# Altium PCB RYA_ESC.PcbDoc (part 2 of 4)
Units mm, origin at the board's own origin, x right, y up, seen from the top; angles counter-clockwise.
Board outline 81.86 x 50.16 mm, 4 copper layers (Top Layer, Signal1, Signal2, Bottom Layer), stack 1.586 mm thick; 309 components, 155 nets, 862 pads, 372 vias.
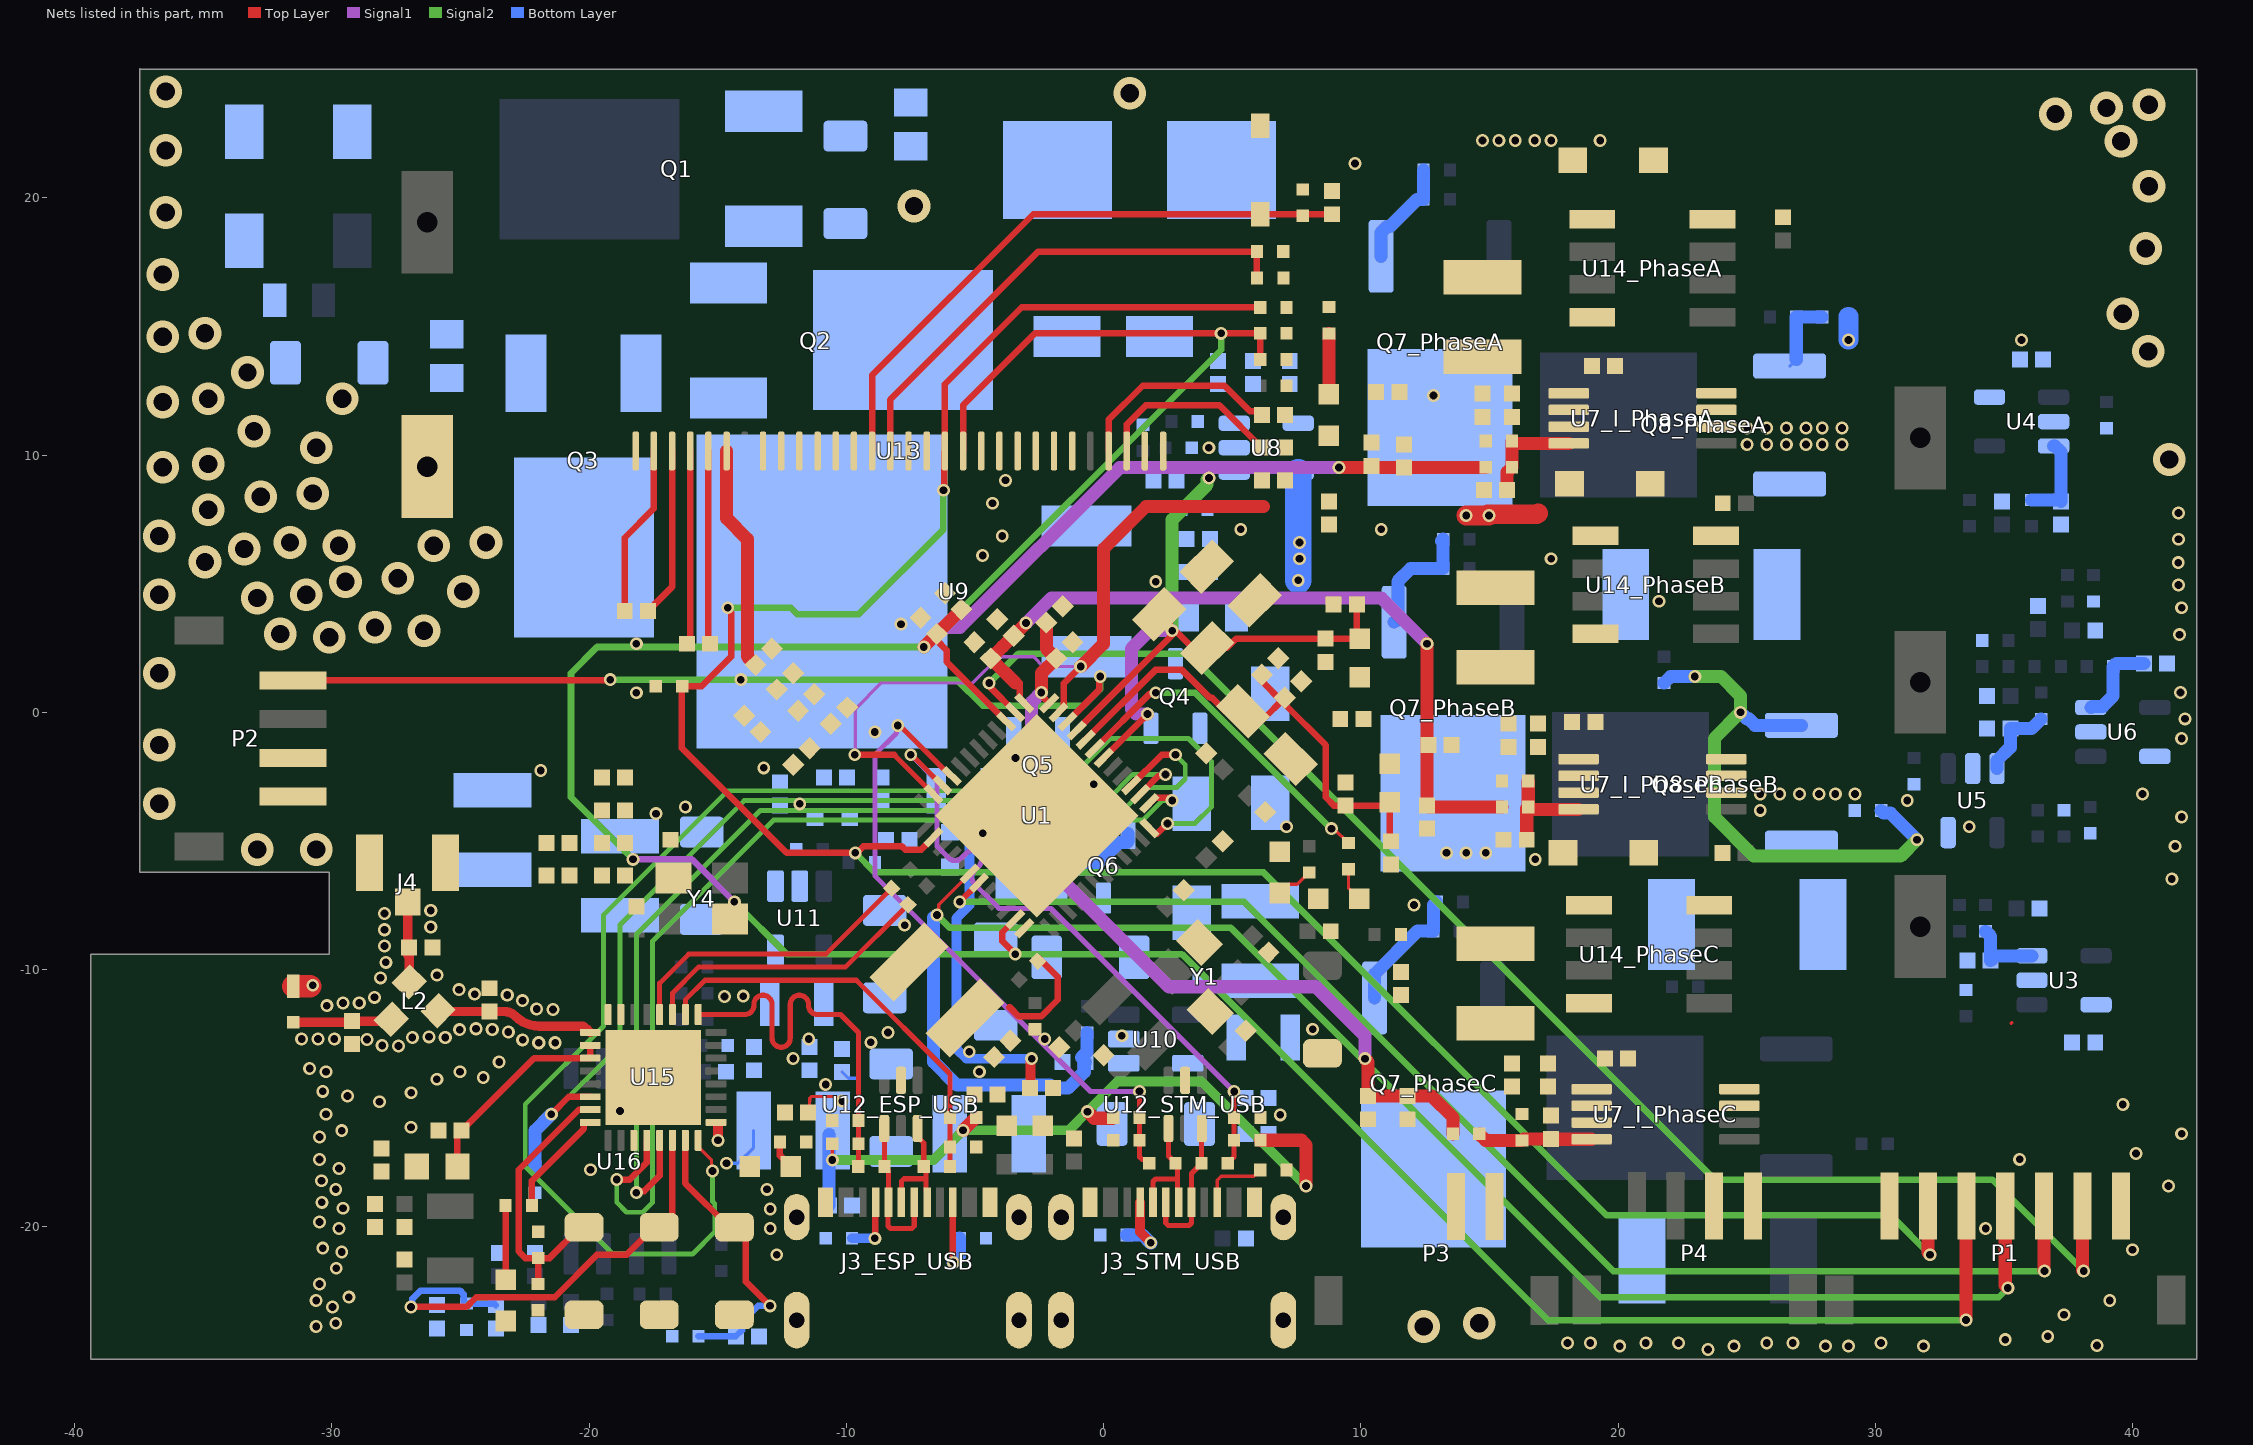
[diagram p4: the nets of this part, all layers, seen from the top]

## Part data
Ant1: library part CMP-240-000001-3, "Antenna Invert F 2.4Ghz", Component Type=Standard, Design Item ID=IFA-2.4Ghz, Pin Count=2, Source=IFA2.4GHZ.SchLib
C1 C80: library part CMP-001-00375-1, "470 µF Molded Tantalum Polymer Capacitor 25 V 1411 (3528 Metric), 1210 150mOhm @ 100kHz", Case/Package="1210 AVX", Check_prices=https://www.snapeda.com/parts/TCJB106M025R0150/AVX/view-part/?ref=eda, Component Type=Standard, Design Item ID=TCJB106M025R0150, MF=AVX, MP=TCJB106M025R0150, Pins=2, SnapEDA_Link=https://www.snapeda.com/parts/TCJB106M025R0150/AVX/view-part/?ref=snap, Source=TCJB106M025R0150.SchLib
C2 C3 C4 C5 C6 C10 C11 C12 C14 C15 C16 C56 C57 C62 C63 C70_ESP_USB C70_STM_USB C91 C93 C95 C104 C105: library part CMP-001-00354-3, "Capacitor 100nF 0402", Case Code (Metric)=1005, Case/Package=0402, Dielectric=X5R, Max Operating Temperature=85°C, Min Operating Temperature=-55°C, Package Quantity=1, Tolerance=20%, Voltage Rating=4V, Component Type=Standard, Construction=Flat, Design Item ID=CMP-1034-02139-2, Halogen Free="Halogen Free", Height=0.5mm, Length=0.039inch, Mount="Surface Mount", Packaging="Tape and Reel", Pins=2, RoHS Compliant=Yes, Series=M, Source=0402-10uF.SchLib, Termination=SMD/SMT, Thickness=0.028inch, Voltage Rating (DC)=4V, Width=0.02inch
C7 C73: library part CMP-001-00364-1, "Capacitor 4.7uF 0402", Case Code (Metric)=1005, Case/Package=0402, Dielectric=X5R, Max Operating Temperature=85°C, Min Operating Temperature=-55°C, Package Quantity=1, Tolerance=20%, Voltage Rating=4V, Component Type=Standard, Construction=Flat, Design Item ID=CMP-1034-02139-2, Halogen Free="Halogen Free", Height=0.5mm, Length=0.039inch, Mount="Surface Mount", Packaging="Tape and Reel", Pins=2, RoHS Compliant=Yes, Series=M, Source=0402-10uF.SchLib, Termination=SMD/SMT, Thickness=0.028inch, Voltage Rating (DC)=4V, Width=0.02inch
C8 C9 C13: library part CMP-001-00370-3, "Tantalum Capacitors - Polymer SMD 6.3V 47uF 1206 10% ESR=150mOhms", Case/Package="SMD-2 Kemet", Check_prices=https://www.snapeda.com/parts/T543A476K006ATW150/KEMET/view-part/?ref=eda, Component Type=Standard, Design Item ID=T543A476K006ATW150, MF=KEMET, MP=T543A476K006ATW150, Pins=2, SnapEDA_Link=https://www.snapeda.com/parts/T543A476K006ATW150/KEMET/view-part/?ref=snap, Source=T543A476K006ATW150.SchLib
C17 C38_I_PhaseA C38_I_PhaseB C38_I_PhaseC C39_I_PhaseA C39_I_PhaseB C39_I_PhaseC C47 C48 C49 C50 C53 C60 C66 C69_ESP_USB C69_STM_USB C84 C85 C86 C92: library part CMP-001-00352-3, "Capacitor 10uF 0402s", Case Code (Metric)=1005, Case/Package=0402, Dielectric=X5R, Max Operating Temperature=85°C, Min Operating Temperature=-55°C, Package Quantity=1, Tolerance=20%, Voltage Rating=4V, Component Type=Standard, Construction=Flat, Design Item ID=CMP-1034-02139-2, Halogen Free="Halogen Free", Height=0.5mm, Length=0.039inch, Mount="Surface Mount", Packaging="Tape and Reel", Pins=2, RoHS Compliant=Yes, Series=M, Source=0402-10uF.SchLib, Termination=SMD/SMT, Thickness=0.028inch, Voltage Rating (DC)=4V, Width=0.02inch
C18 C19 C106 C107: library part CMP-001-00362-3, "Capacitor 6pF 0402", Case Code (Metric)=1005, Case/Package=0402, Dielectric=X5R, Max Operating Temperature=85°C, Min Operating Temperature=-55°C, Package Quantity=1, Tolerance=20%, Voltage Rating=4V, Component Type=Standard, Construction=Flat, Design Item ID=CMP-1034-02139-2, Halogen Free="Halogen Free", Height=0.5mm, Length=0.039inch, Mount="Surface Mount", Packaging="Tape and Reel", Pins=2, RoHS Compliant=Yes, Series=M, Source=0402-10uF.SchLib, Termination=SMD/SMT, Thickness=0.028inch, Voltage Rating (DC)=4V, Width=0.02inch
C20 C21 C102 C103: library part CMP-001-00374-1, "Capacitor 15pF 0402", Case Code (Metric)=1005, Case/Package=0402, Dielectric=X5R, Max Operating Temperature=85°C, Min Operating Temperature=-55°C, Package Quantity=1, Tolerance=20%, Voltage Rating=4V, Component Type=Standard, Construction=Flat, Design Item ID=CMP-1034-02139-2, Halogen Free="Halogen Free", Height=0.5mm, Length=0.039inch, Mount="Surface Mount", Packaging="Tape and Reel", Pins=2, RoHS Compliant=Yes, Series=M, Source=0402-10uF.SchLib, Termination=SMD/SMT, Thickness=0.028inch, Voltage Rating (DC)=4V, Width=0.02inch
C22 C24 C25 C26 C27 C29 C31 C32 C33 C35 C36 C42_I_PhaseA C42_I_PhaseB C42_I_PhaseC: library part CMP-001-00357-4, "Capacitor 1nF 0402", Case Code (Metric)=1005, Case/Package=0402, Dielectric=X5R, Max Operating Temperature=85°C, Min Operating Temperature=-55°C, Package Quantity=1, Tolerance=20%, Voltage Rating=4V, Component Type=Standard, Construction=Flat, Design Item ID=CMP-1034-02139-2, Halogen Free="Halogen Free", Height=0.5mm, Length=0.039inch, Mount="Surface Mount", Packaging="Tape and Reel", Pins=2, RoHS Compliant=Yes, Series=M, Source=0402-10uF.SchLib, Termination=SMD/SMT, Thickness=0.028inch, Voltage Rating (DC)=4V, Width=0.02inch
C23 C28 C30 C34 C40_I_PhaseA C40_I_PhaseB C40_I_PhaseC C41_I_PhaseA C41_I_PhaseB C41_I_PhaseC C43_I_PhaseA C43_I_PhaseB C43_I_PhaseC C44_I_PhaseA C44_I_PhaseB C44_I_PhaseC C45_I_PhaseA C45_I_PhaseB C45_I_PhaseC C46_I_PhaseA C46_I_PhaseB C46_I_PhaseC C88 C100 C101: library part CMP-001-00355-4, "Capacitor 10nF 0402", Case Code (Metric)=1005, Case/Package=0402, Dielectric=X5R, Max Operating Temperature=85°C, Min Operating Temperature=-55°C, Package Quantity=1, Tolerance=20%, Voltage Rating=4V, Component Type=Standard, Construction=Flat, Design Item ID=CMP-1034-02139-2, Halogen Free="Halogen Free", Height=0.5mm, Length=0.039inch, Mount="Surface Mount", Packaging="Tape and Reel", Pins=2, RoHS Compliant=Yes, Series=M, Source=0402-10uF.SchLib, Termination=SMD/SMT, Thickness=0.028inch, Voltage Rating (DC)=4V, Width=0.02inch
C37_I_PhaseA C37_I_PhaseB C37_I_PhaseC C55 C58 C61 C64: library part CMP-001-00373-1, "100µF Molded Tantalum Polymer Capacitor 25 V 1411 (3528 Metric), 1210 150mOhm @ 100kHz", Case/Package="1210 AVX", Check_prices=https://www.snapeda.com/parts/TCJB106M025R0150/AVX/view-part/?ref=eda, Component Type=Standard, Design Item ID=TCJB106M025R0150, MF=AVX, MP=TCJB106M025R0150, Pins=2, SnapEDA_Link=https://www.snapeda.com/parts/TCJB106M025R0150/AVX/view-part/?ref=snap, Source=TCJB106M025R0150.SchLib
C51: library part CMP-014-00008-1, "V-Chip, D4 x H5.8mm, 47uF, 6.3V", Capacitance=47µF, Capacitance Tolerance=+/-20%, Leakage Current=3uA, Manufacturer="Wurth Elektronik", Manufacturer Part Number=N/A, Operating Temperature Max=105°C, Operating Temperature Min=-55°C, Rated Voltage (DC)=6.3V, Ripple Current=86mA, Category="Aluminum Electrolytic Capacitors", Component Type=Standard, Design Item ID=865080140002, Diameter=4mm, Dissipation Factor=24%, Endurance=2000h, Height=5.5mm, Mount="Surface Mount", Packaging="Tape and Reel", Pins=2, Source=Al_Cap.SchLib, Supplier 1 Name=Mouser, Supplier 1 SN=710-865080140002, Supplier 1 URL=https://www.mouser.vn/ProductDetail/Wurth-Elektronik/865080140002?qs=0KOYDY2FL2%252BjKlezJ2boQA%3D%3D, Supplier 2 Name=Digi-Key, Supplier 2 SN=N/A, Supplier 2 URL=N/A, Supplier 3 Name=thegioiic, Supplier 3 SN=EEEHB0J330AR, Supplier 3 URL=https://www.thegioiic.com/tu-nhom-smd-47uf-6-3v-5x5-4mm
C52 C54 C59 C65 C71 C72 C75 C76 C77 C78 C81 C82 C83 C87 C90 C94 C98 C99: library part CMP-001-00353-3, "Capacitor 1uF 0402s", Case Code (Metric)=1005, Case/Package=0402, Dielectric=X5R, Max Operating Temperature=85°C, Min Operating Temperature=-55°C, Package Quantity=1, Tolerance=20%, Voltage Rating=4V, Component Type=Standard, Construction=Flat, Design Item ID=CMP-1034-02139-2, Halogen Free="Halogen Free", Height=0.5mm, Length=0.039inch, Mount="Surface Mount", Packaging="Tape and Reel", Pins=2, RoHS Compliant=Yes, Series=M, Source=0402-10uF.SchLib, Termination=SMD/SMT, Thickness=0.028inch, Voltage Rating (DC)=4V, Width=0.02inch
C67 C68: library part CMP-001-00259-1, "CAP, size 0805, 0.1 nF, 50 VDC", Manufacture Name=TDK, Manufacture SN=CGA4J2X8R1H104K125AD, Operating Temperature="-55 to +125degC", Tolerance=10%, Voltage Rating DC="50 VDC", Component Type=Standard, Design Item ID=0108051041050, Mounting Technology=SMT, Packaging="Tape and Reel", Pins=2, Size=0805, Source=Capacitor_0805_10_percent.SchLib, Supplier 1 Name=Mouser, Supplier 1 SN=810-C2012X8R1H104KEP, Supplier 1 URL=https://www.mouser.vn/ProductDetail/TDK/CGA4J2X8R1H104K125AD?qs=LcTL%2F5vFEzExqZqv3rh1qQ%3D%3D&utm_source=mouser-refine-download&utm_medium=file&utm_campaign=CGA4J2X8R1H104K125AD&utm_content=TDK, Supplier 2 Name=Digi-Key, Supplier 2 SN=445-8810-2-ND, Supplier 2 URL=https://www.digikey.com/en/products/detail/tdk-corporation/cga4j2x8r1h104k125ad/3248169, Supplier 3 Name=thegioiic, Supplier 3 SN=OEM, Supplier 3 URL=N/A
C74: library part CMP-001-00356-1, "Capacitor 2.2uF 0402", Case Code (Metric)=1005, Case/Package=0402, Dielectric=X5R, Max Operating Temperature=85°C, Min Operating Temperature=-55°C, Package Quantity=1, Tolerance=20%, Voltage Rating=4V, Component Type=Standard, Construction=Flat, Design Item ID=CMP-1034-02139-2, Halogen Free="Halogen Free", Height=0.5mm, Length=0.039inch, Mount="Surface Mount", Packaging="Tape and Reel", Pins=2, RoHS Compliant=Yes, Series=M, Source=0402-10uF.SchLib, Termination=SMD/SMT, Thickness=0.028inch, Voltage Rating (DC)=4V, Width=0.02inch
C79_PhaseA C79_PhaseB C79_PhaseC: library part CMP-001-00366-1, "Capacitor 22uF 0402", Case Code (Metric)=1005, Case/Package=0402, Dielectric=X5R, Max Operating Temperature=85°C, Min Operating Temperature=-55°C, Package Quantity=1, Tolerance=20%, Voltage Rating=4V, Component Type=Standard, Construction=Flat, Design Item ID=CMP-1034-02139-2, Halogen Free="Halogen Free", Height=0.5mm, Length=0.039inch, Mount="Surface Mount", Packaging="Tape and Reel", Pins=2, RoHS Compliant=Yes, Series=M, Source=0402-10uF.SchLib, Termination=SMD/SMT, Thickness=0.028inch, Voltage Rating (DC)=4V, Width=0.02inch
C89 C96 C97: library part CMP-001-00361-3, "Capacitor 1pF 0402", Case Code (Metric)=1005, Case/Package=0402, Dielectric=X5R, Max Operating Temperature=85°C, Min Operating Temperature=-55°C, Package Quantity=1, Tolerance=20%, Voltage Rating=4V, Component Type=Standard, Construction=Flat, Design Item ID=CMP-1034-02139-2, Halogen Free="Halogen Free", Height=0.5mm, Length=0.039inch, Mount="Surface Mount", Packaging="Tape and Reel", Pins=2, RoHS Compliant=Yes, Series=M, Source=0402-10uF.SchLib, Termination=SMD/SMT, Thickness=0.028inch, Voltage Rating (DC)=4V, Width=0.02inch
D1 D2 D19: library part CMP-004-00095-1, "WL-SMCW SMT Mono-color Chip LED Blur, size 0603, White", Color=White, Component Type=Standard, ComponentLink1Description="Datasheet link", ComponentLink1URL=N/A, ComponentLink2Description="Supplier 1 URL", ComponentLink2URL=https://www.mouser.vn/ProductDetail/ROHM-Semiconductor/SMLEN3WBC8W1?qs=W0yvOO0ixfGun78rr9Unsw%3D%3D, ComponentLink3Description="Supplier 2 URL", ComponentLink3URL=https://www.digikey.com/en/products/detail/qt-brightek-qtb/QBLP601-IW/4814655, ComponentLink4Description="Supplier 3 URL", ComponentLink4URL=N/A, Design Item ID=160603WhiteBlur, Pins=2, Size=0603, Source=WL-SMCW_0603.SchLib, Supplier 1 Name=Mouser, Supplier 1 SN=755-SMLEN3WBC8W1, Supplier 1 URL=https://www.mouser.vn/ProductDetail/ROHM-Semiconductor/SMLEN3WBC8W1?qs=W0yvOO0ixfGun78rr9Unsw%3D%3D, Supplier 2 Name=Digi-Key, Supplier 2 SN=1516-1057-2-ND, Supplier 2 URL=https://www.digikey.com/en/products/detail/qt-brightek-qtb/QBLP601-IW/4814655, Supplier 3 Name=ICDayRoi, Supplier 3 SN=N/A, Supplier 3 URL=N/A, Type=Blur
D3 D6: library part CMP-004-00117-3, Component Type=Standard, Datasheet=https://diotec.com/de/produktliste/SBD.html, Design Item ID=Zener, ki_description=Zener, ki_keywords=Zener, Pins=2, Reference=D, Source=schottky-diode.SchLib
D4 D7: library part CMP-004-00123-1, "ZenerDiode 3.6V", Component Type=Standard, Datasheet=https://diotec.com/de/produktliste/SBD.html, Design Item ID=Zener, ki_description=Zener, ki_keywords=Zener, Pins=2, Reference=D, Source=schottky-diode.SchLib
D5 D8: library part CMP-004-00093-1, "WL-SMCW SMT Mono-color Chip LED Blur, size 0603, Red, 2V, 140deg", Color=Red, Component Type=Standard, ComponentLink1Description="Datasheet link", ComponentLink1URL=N/A, ComponentLink2Description="Supplier 1 URL", ComponentLink2URL=https://www.mouser.vn/ProductDetail/ROHM-Semiconductor/CSL1901VW1?qs=vvQtp7zwQdNmrXZcE27xEA%3D%3D, ComponentLink3Description="Supplier 2 URL", ComponentLink3URL=https://www.digikey.com/en/products/detail/rohm-semiconductor/SML-D12U8WT86/1641799, ComponentLink4Description="Supplier 3 URL", ComponentLink4URL=N/A, Design Item ID=160603RedBlur, Pins=2, Size=0603, Source=WL-SMCW_0603.SchLib, Supplier 1 Name=Mouser, Supplier 1 SN=755-CSL1901VW1, Supplier 1 URL=https://www.mouser.vn/ProductDetail/ROHM-Semiconductor/CSL1901VW1?qs=vvQtp7zwQdNmrXZcE27xEA%3D%3D, Supplier 2 Name=Digi-Key, Supplier 2 SN=511-1580-2-ND, Supplier 2 URL=https://www.digikey.com/en/products/detail/rohm-semiconductor/SML-D12U8WT86/1641799, Supplier 3 Name=ICDayRoi, Supplier 3 SN=N/A, Supplier 3 URL=N/A, Type=Blur
D9 D11 D13 D15: library part CMP-004-00085-1, "400W, 21.1V, 5%, Unidirectional, TVS", Case/Package="SMA-2 Taiwan Semiconductor", Check_prices=https://www.snapeda.com/parts/SMAJ18A/taiwan/view-part/?ref=eda, Component Type=Standard, Design Item ID=SMAJ18A, MF="Taiwan Semiconductor", MP=SMAJ18A, Pins=2, SnapEDA_Link=https://www.snapeda.com/parts/SMAJ18A/taiwan/view-part/?ref=snap, Source=SMAJ18A.SchLib
D10 D12 D14 D16: library part CMP-004-00086-2, Component Type=Standard, Datasheet=https://diotec.com/de/produktliste/SBD.html, Design Item ID=Schottky-Diode, ki_description="Schottky Diode", ki_keywords=Schottky, Pins=2, Reference=D, Source=schottky-diode.SchLib
D17: library part CMP-004-00119-1, Package=None, Availability=Unavailable, Component Type=Standard, Design Item ID=1N4148W, MP=1N4148W, Pins=2, Price=None, Source=1N4148W.SchLib
D18_PhaseA D18_PhaseB D18_PhaseC: library part CMP-004-00113-1, Component Type=Standard, Design Item ID=1N5819W, Pins=2, Source=1N5819W.SchLib
F1 F2: library part CMP-005-00046-1, "Resettable Fuse, Size 0805, 6V, 0.5A", Hold Current=0.5A, Manufacturer=Littelfuse, Threshold Current=100A, Threshold Voltage=6V, Trip Current=1A, Component Type=Standard, ComponentLink1Description="Datasheet link", ComponentLink1URL=https://www.littelfuse.com/~/media/electronics/datasheets/resettable_ptcs/littelfuse_ptc_0805l_datasheet.pdf.pdf, ComponentLink2Description="Supplier 1 URL", ComponentLink2URL=https://www.mouser.vn/ProductDetail/Littelfuse/0805L050WR?qs=SJZ%252BTX%252BI2BS1ufZ22HRodg%3D%3D, ComponentLink3Description="Supplier 2 URL", ComponentLink3URL=https://www.digikey.com/en/products/detail/littelfuse-inc/0805L050WR/1212822?s=N4IgTCBcDaIAwA44FYAyK4HUBKACEAugL5A, ComponentLink4Description="Supplier 3 URL", ComponentLink4URL=https://www.thegioiic.com/0805l050wr-cau-chi-tu-phuc-hoi-0805-6v-500ma, Design Item ID=060805050006, Mounting Technology=SMT/SMD, Pins=2, Size=0805, Source=Fuse_SMD.SchLib, Supplier 1 Name=Mouser, Supplier 1 SN=576-0805L050, Supplier 1 URL=https://www.mouser.vn/ProductDetail/Littelfuse/0805L050WR?qs=SJZ%252BTX%252BI2BS1ufZ22HRodg%3D%3D, Supplier 2 Name=Digi-Key, Supplier 2 SN=F2772TR-ND, Supplier 2 URL=https://www.mouser.vn/ProductDetail/Littelfuse/0805L050WR?qs=SJZ%252BTX%252BI2BS1ufZ22HRodg%3D%3D, Supplier 3 Name=thegioiic, Supplier 3 SN=0805L050WR, Supplier 3 URL=https://www.thegioiic.com/0805l050wr-cau-chi-tu-phuc-hoi-0805-6v-500ma
F3: library part CMP-005-00062-2, "Fuse 1808 with case", Case/Package="SMD-2 Littelfuse", Availability="In Stock", Check_prices=https://www.snapeda.com/parts/0154007.DR/Littelfuse+Inc./view-part/?ref=eda, Component Type=Standard, Design Item ID=0154007.DR, MF="Littelfuse Inc.", MP=0154007.DR, Pins=2, Price=None, Purchase-URL=https://pricing.snapeda.com/search?q=0154007.DR&ref=eda, SnapEDA_Link=https://www.snapeda.com/parts/0154007.DR/Littelfuse+Inc./view-part/?ref=snap, Source=0154007.DR.SchLib
F4: library part CMP-005-00047-1, "Resettable Fuse, Size 0805, 6V, 1A", Hold Current=1A, Manufacturer=Littelfuse, Threshold Current=40A, Threshold Voltage=6V, Trip Current=1.95A, Component Type=Standard, ComponentLink1Description="Datasheet link", ComponentLink1URL=https://www.littelfuse.com/~/media/electronics/datasheets/resettable_ptcs/littelfuse_ptc_0805l_datasheet.pdf.pdf, ComponentLink2Description="Supplier 1 URL", ComponentLink2URL=https://www.mouser.vn/ProductDetail/Littelfuse/0805L100WR?qs=SJZ%252BTX%252BI2BTMlREVsW49pQ%3D%3D, ComponentLink3Description="Supplier 2 URL", ComponentLink3URL=https://www.digikey.com/en/products/detail/littelfuse-inc/0805L100WR/1212824, ComponentLink4Description="Supplier 3 URL", ComponentLink4URL=https://www.thegioiic.com/0805l100wr-cau-chi-tu-phuc-hoi-0805-6v-1a, Design Item ID=060805100006, Mounting Technology=SMT/SMD, Pins=2, Size=0805, Source=Fuse_SMD.SchLib, Supplier 1 Name=Mouser, Supplier 1 SN=576-0805L100, Supplier 1 URL=https://www.mouser.vn/ProductDetail/Littelfuse/0805L100WR?qs=SJZ%252BTX%252BI2BTMlREVsW49pQ%3D%3D, Supplier 2 Name=Digi-Key, Supplier 2 SN=F2774TR-ND, Supplier 2 URL=https://www.mouser.vn/ProductDetail/Littelfuse/0805L100WR?qs=SJZ%252BTX%252BI2BTMlREVsW49pQ%3D%3D, Supplier 3 Name=thegioiic, Supplier 3 SN=0805L100WR, Supplier 3 URL=https://www.thegioiic.com/0805l100wr-cau-chi-tu-phuc-hoi-0805-6v-1a
FB1 FB2: library part CMP-006-00090-1, "Ferrite, 0603, 600 Ohms, 300 mA", Manufacture Name="Wurth Elektronik", Manufacture SN=742792651, Maximum DC Current="1 A", Maximum DC Resistance="200 mOhms", Operating Temperature="-55 to +125degC", Test Frequency=100MHz, Tolerance=25%, Component Type=Standard, Design Item ID=03060360110225, Impedance="600 Ohms", Mounting Technology=SMT, Packaging="Tape and Reel", Pins=2, Size=0603, Source=Ferrite_Bead_0603.SchLib, Supplier 1 Name=Mouser, Supplier 1 SN=710-742792651, Supplier 1 URL=https://www.mouser.com/ProductDetail/Wurth-Elektronik/742792651?qs=sGAEpiMZZMt1hubY80%2Fs8M60rIzA20dgTaAssd1%2FEf4%3D&utm_source=mouser-refine-download&utm_medium=file&utm_campaign=742792651&utm_content=Wurth-Elektronik, Supplier 2 Name=Digi-Key, Supplier 2 SN=N/A, Supplier 2 URL=N/A, Supplier 3 Name=thegioiic, Supplier 3 SN=N/A, Supplier 3 URL=N/A
FB3 FB4: library part CMP-006-00234-2, "Ferrite Chip, 1 Function(s), 2A, 2 Pin(s)", Current Rating=2A, DC Resistance-Max=50mR, Max Operating Temperature=125°C, Min Operating Temperature=-55°C, Height=0.8mm, Length=1.6mm, Material=Ferrite, Packaging="Tape and Reel", RoHS Compliant=Yes, Width=0.8mm
FB5_ESP_USB FB5_STM_USB: library part CMP-006-00090-1, "Ferrite, 0603, 600 Ohms, 1 A", Manufacture Name="Wurth Elektronik", Manufacture SN=742792651, Maximum DC Current="1 A", Maximum DC Resistance="200 mOhms", Operating Temperature="-55 to +125degC", Test Frequency=100MHz, Tolerance=25%, Component Type=Standard, Design Item ID=03060360110225, Impedance="600 Ohms", Mounting Technology=SMT, Packaging="Tape and Reel", Pins=2, Size=0603, Source=Ferrite_Bead_0603.SchLib, Supplier 1 Name=Mouser, Supplier 1 SN=710-742792651, Supplier 1 URL=https://www.mouser.com/ProductDetail/Wurth-Elektronik/742792651?qs=sGAEpiMZZMt1hubY80%2Fs8M60rIzA20dgTaAssd1%2FEf4%3D&utm_source=mouser-refine-download&utm_medium=file&utm_campaign=742792651&utm_content=Wurth-Elektronik, Supplier 2 Name=Digi-Key, Supplier 2 SN=N/A, Supplier 2 URL=N/A, Supplier 3 Name=thegioiic, Supplier 3 SN=N/A, Supplier 3 URL=N/A
J1: library part CMP-118-000008-1, "High Power Terminal , 25A , 300V", Component Type=Standard, Design Item ID=HB9500-2, Pin Count=2, Source=HB9500-2.SchLib
J2: library part CMP-118-000006-1, "High Power Terminal , 25A , 300V", Component Type=Standard, Design Item ID=HB9500-3, Pin Count=3, Source=HB9500-3.SchLib
J3_ESP_USB J3_STM_USB: library part CMP-002-01572-3, "USB Type C - Connector, Top-mount SMT, 16pos", Case/Package=None, Check_prices=https://www.snapeda.com/parts/217179-0001/Molex/view-part/?ref=eda, Component Type=Standard, Design Item ID=2171790001, MF=Molex, MP=217179-0001, Pins=16, SnapEDA_Link=https://www.snapeda.com/parts/217179-0001/Molex/view-part/?ref=snap, Source=2171790001.SchLib
J4: library part CMP-002-01573-1, "1 POS Vertical SMD Small form factor with big performance through 6 GHz connector,MHF, RF, micro-coaxial MHF I Receptacle", Case/Package=None, Check_prices=https://www.snapeda.com/parts/20279-001E-03/I-PEX/view-part/?ref=eda, Component Type=Standard, Design Item ID=20279-001E-03, MF=I-PEX, MP=20279-001E-03, Pins=3, SnapEDA_Link=https://www.snapeda.com/parts/20279-001E-03/I-PEX/view-part/?ref=snap, Source=20279-001E-03.SchLib
L1: library part CMP-006-00351-2, Case/Package=None, Availability=Unavailable, Component Type=Standard, ComponentLink1Description="Datasheet Link", ComponentLink2Description="Website Link", Design Item ID=DFE18SBN1R0ME0L, MP=DFE18SBN1R0ME0L, Pins=2, Price=None, Source=DFE18SBN1R0ME0L.SchLib
L2: library part CMP-006-00364-1, "0603-2nH Selected", Case/Package=None, Availability=Unavailable, Component Type=Standard, ComponentLink1Description="Datasheet Link", ComponentLink2Description="Website Link", Design Item ID=DFE18SBN1R0ME0L, MP=DFE18SBN1R0ME0L, Pins=2, Price=None, Source=DFE18SBN1R0ME0L.SchLib
P1: library part CMP-002-01153-1, "WR-WTB SMT Male Horizontal Shrouded Header, pitch 1.5mm, 7p", Contact Resistance=20mOhm, Operating Temperature="-25 to +85degC", Rated Current=1A, Withstanding Voltage=500VAC, Working Voltage=50VAC, Component Type=Standard, ComponentLink1Description=Manufacturer, ComponentLink1URL=http://www.we-online.de, ComponentLink2Description=Datasheet, ComponentLink2URL=https://www.we-online.com/catalog/datasheet/648107131822.pdf, ComponentLink3Description="Global Supply", ComponentLink3URL=https://www.we-online.com/en/components/products/WTB_1_50_SMT_MALE_HORIZONTAL_SHROUDED_HEADER_6481XX131822?sq=648107131822#648107131822, Design Item ID=648107131822, Gender=Male, Mounting Technology=SMT, Packaging="Tape and Reel", Part Number=648107131822, Pin Number=7, Pins=7, Pitch=1.5mm, Published Date="January 2020", Publisher="Wurth Elektronik", Source=WR-WTB_1.50mm.SchLib, Supplier 1 Name=Mouser, Supplier 1 SN=N/A, Supplier 1 URL=N/A, Supplier 2 Name=Digi-Key, Supplier 2 SN=N/A, Supplier 2 URL=N/A, Supplier 3 Name=thegioiic, Supplier 3 SN=N/A, Supplier 3 URL=N/A, Type=Horizontal
P2 P3 P4: library part CMP-002-01150-1, "WR-WTB SMT Male Horizontal Shrouded Header, pitch 1.5mm, 4p", Contact Resistance=20mOhm, Operating Temperature="-25 to +85degC", Rated Current=1A, Withstanding Voltage=500VAC, Working Voltage=50VAC, Component Type=Standard, ComponentLink1Description=Manufacturer, ComponentLink1URL=http://www.we-online.de, ComponentLink2Description=Datasheet, ComponentLink2URL=https://www.we-online.com/catalog/datasheet/648104131822.pdf, ComponentLink3Description="Global Supply", ComponentLink3URL=https://www.we-online.com/en/components/products/WTB_1_50_SMT_MALE_HORIZONTAL_SHROUDED_HEADER_6481XX131822?sq=648104131822#648104131822, ComponentLink4Description="Global Supply", ComponentLink4URL=https://www.mouser.vn/ProductDetail/Wurth-Elektronik/648104131822?qs=ZtY9WdtwX57XPjIMVYKZ6w%3D%3D, Design Item ID=648104131822, Gender=Male, Mounting Technology=SMT, Packaging="Tape and Reel", Part Number=648104131822, Pin Number=4, Pins=4, Pitch=1.5mm, Published Date="January 2020", Publisher="Wurth Elektronik", Source=WR-WTB_1.50mm.SchLib, Supplier 1 Name=Mouser, Supplier 1 SN=710-648104131822, Supplier 1 URL=https://www.mouser.vn/ProductDetail/Wurth-Elektronik/648104131822?qs=ZtY9WdtwX57XPjIMVYKZ6w%3D%3D, Supplier 2 Name=Digi-Key, Supplier 2 SN=N/A, Supplier 2 URL=N/A, Supplier 3 Name=thegioiic, Supplier 3 SN=N/A, Supplier 3 URL=N/A, Type=Horizontal
Q1 Q2 Q3: library part CMP-123-000001-2, "P-Channel 40V 40A (Tc) 2.5W (Ta), 62.5W (Tc) Surface Mount TO-252, (D-Pak)", Package="TO-252 Alpha &amp; Omega Semiconductor", Check_prices=https://www.snapeda.com/parts/AOD4185/Alpha/view-part/?ref=eda, Component Type=Standard, Design Item ID=AOD4185, MF="Alpha &", MP=AOD4185, Pin Count=3, SnapEDA_Link=https://www.snapeda.com/parts/AOD4185/Alpha/view-part/?ref=snap, Source=AOD4185.SchLib
Q4 Q5 Q6: library part CMP-123-000000-1, "P-Channel 30 V 4.3A (Ta) 1.4W (Ta) Surface Mount SOT-23-3", Package="SOT-23 Alpha &amp; Omega Semiconductor", Check_prices=https://www.snapeda.com/parts/AO3407A/Alpha/view-part/?ref=eda, Component Type=Standard, Design Item ID=AO3407A, MF="Alpha &", MP=AO3407A, Pin Count=3, SnapEDA_Link=https://www.snapeda.com/parts/AO3407A/Alpha/view-part/?ref=snap, Source=AO3407A.SchLib
Q7_PhaseA Q7_PhaseB Q7_PhaseC Q8_PhaseA Q8_PhaseB Q8_PhaseC: library part CMP-123-000003-1, "RoHS Compliant", Package="TO-252-3 Infineon", Availability="In Stock", Check_prices=https://www.snapeda.com/parts/IRLR7843TRPBF/Infineon+Technologies/view-part/?ref=eda, Component Type=Standard, Design Item ID=IRLR7843TRPBF, MF="Infineon Technologies", MP=IRLR7843TRPBF, Pin Count=3, Price=None, Purchase-URL=https://pricing.snapeda.com/search/part/IRLR7843TRPBF/?ref=eda, SnapEDA_Link=https://www.snapeda.com/parts/IRLR7843TRPBF/Infineon+Technologies/view-part/?ref=snap, Source=IRLR7843TRPBF.SchLib
R1 R4 R33 R36 R61 R69 R72 R73: library part CMP-009-00688-1, "RES 0402 3.3K"
R2 R3 R5 R32 R35 R62 R63 R64 R65 R66 R70 R71: library part CMP-009-00678-4, "0402Resistor 0 Ohm"
R6 R7 R14 R16 R17 R18 R21 R22 R24 R27_I_PhaseA R27_I_PhaseB R27_I_PhaseC R28 R30 R41_ESP_USB R41_STM_USB R42_ESP_USB R42_STM_USB R43_ESP_USB R43_STM_USB R46_ESP_USB R46_STM_USB R47_ESP_USB R47_STM_USB R48_ESP_USB R48_STM_USB R50 R51 R52 R54 R55 R56 R58_PhaseA R58_PhaseB R58_PhaseC R60_PhaseA R60_PhaseB R60_PhaseC R67 R68: library part CMP-009-00675-4, "RES 0402 10K"
R8 R9 R10 R11 R13 R15: library part CMP-009-00680-1, "RES 0402 47K"
R12 R19 R20 R23: library part CMP-009-00691-1, "0402Resistor 680Ohm"
R25_I_PhaseA R25_I_PhaseB R25_I_PhaseC: library part CMP-009-00698-1, "0402Resistor 1Ohm"
R26_I_PhaseA R26_I_PhaseB R26_I_PhaseC: library part CMP-009-00697-1, "RES 0.01 OHM 1% 3W 2512", Case Code (Metric)=6432, Case/Package=2512, Max Operating Temperature=170°C, Min Operating Temperature=-65°C, Package Quantity=2000, Power Rating=3W, Resistance Tolerance=1%, Resistor Type="Metal Strip", Temperature Coefficient=75ppm/°C, Component Type=Standard, Design Item ID=CMP-02407-010954-1, Height=0.635mm, Lead Free="Lead Free", Length=6.4mm, Packaging="Tape and Reel", Pins=2, RoHS Compliant=Yes, Series=WSLP, Source=2512.SchLib, Termination=SMD/SMT, Tolerance=1%, Weight=0.001429oz, Width=3.2mm
R29 R44_ESP_USB R44_STM_USB R45_ESP_USB R45_STM_USB: library part CMP-009-00695-1, "0402Resistor 22Ohm"
R31: library part CMP-009-00674-3, "0402Resistor 1K Ohm"
R34 R37: library part CMP-009-00683-1, "RES 0402 100K"
R38 R39 R40: library part CMP-009-00482-1, "RES, size 0805, 10 KOhm, 1/8 W", Manufacture  Name="Vishay Dale", Manufacture  SN=CRCW080515K0FKEAC, Rated Power="1/8 W", Resistance Tolerance=+/-1%, Component Type=Standard, ComponentLink1Description="Datasheet link", ComponentLink1URL=https://www.vishay.com/docs/28773/crcwce3.pdf, ComponentLink2Description="Supplier 1 URL", ComponentLink2URL=https://www.mouser.vn/ProductDetail/Vishay-Dale/CRCW080515K0FKEA?qs=bMjB6bAaLEM4rXT2DoR3BA%3D%3D, ComponentLink3Description="Supplier 2 URL", ComponentLink3URL=https://www.digikey.com/en/products/detail/vishay-dale/CRCW080515K0FKEAC/7928558, ComponentLink4Description="Supplier 3 URL", ComponentLink4URL=N/A, Design Item ID=0008051531, Mounting Technology=SMT, Pins=2, Size=0805, Source=Resistor_0805.SchLib, Supplier 1 Name=Mouser, Supplier 1 SN=71-CRCW0805-15K-E3, Supplier 1 URL=https://www.mouser.vn/ProductDetail/Vishay-Dale/CRCW080515K0FKEA?qs=bMjB6bAaLEM4rXT2DoR3BA%3D%3D, Supplier 2 Name=Digi-Key, Supplier 2 SN=541-4136-2-ND, Supplier 2 URL=https://www.digikey.com/en/products/detail/vishay-dale/CRCW080515K0FKEAC/7928558, Supplier 3 Name=Thegioiic, Supplier 3 SN=N/A, Supplier 3 URL=N/A
R49: library part CMP-009-00676-1, "RES 0402 470K"
R53: library part CMP-009-00687-2, "RES 0402 4.7K"
R57_PhaseA R57_PhaseB R57_PhaseC R59_PhaseA R59_PhaseB R59_PhaseC: library part CMP-009-00677-3, "0402Resistor 100Ohm"
U1: library part CMP-031-00017-3, "ARMÂ® CortexÂ®-M4F STM32G4 Microcontroller IC 32-Bit Single-Core 170MHz 128KB (128K x 8) FLASH 48-UFQFPN (7x7)", Case/Package="UFQFPN-48 STMicroelectronics", Check_prices=https://www.snapeda.com/parts/STM32G431CBU6/STMicroelectronics/view-part/?ref=eda, Component Type=Standard, Design Item ID=STM32G431CBU6, MF=STMicroelectronics, MP=STM32G431CBU6, Pins=49, SnapEDA_Link=https://www.snapeda.com/parts/STM32G431CBU6/STMicroelectronics/view-part/?ref=snap, Source=STM32G431CBU6.SchLib
U2 U17 U18 U19: library part CMP-011-00123-3, "Switch Tactile N.O. SPST Round Button Gull Wing 0.05A 12VDC 1.5N SMD T/R", Case/Package=None, Check_prices=https://www.snapeda.com/parts/B3U1000P/Omron/view-part/?ref=eda, Component Type=Standard, Design Item ID=B3U-1000P, MF=Omron, MP=B3U1000P, Pins=2, SnapEDA_Link=https://www.snapeda.com/parts/B3U1000P/Omron/view-part/?ref=snap, Source=B3U-1000P.SchLib
U3 U4 U5 U6: library part CMP-014-00080-6, "General Purpose Amplifier 1 Circuit Rail-to-Rail SOT-23-5", Case/Package="SOT-23 Microchip", Availability=Unavailable, Component Type=Standard, Design Item ID=MCP601T-I/OT, MF=Microchip, MP=MCP601T-I/OT, Pins=5, Price=None, SnapEDA_Link=https://www.snapeda.com/parts/MCP601T-I/OT/Microchip/view-part/43729/?ref=snap, Source=SnapEDAsch.SchLib
U7_I_PhaseA U7_I_PhaseB U7_I_PhaseC: library part CMP-014-00085-3, "-4 to 80V, bidirectional, ultra-precise current sense amplifier with enhanced PWM rejection", Case/Package="TSSOP-8 Texas Instruments", Check_prices=https://www.snapeda.com/parts/INA240A1PW/Texas+Instruments/view-part/?ref=eda, Component Type=Standard, Design Item ID=INA240A1PW, MF="Texas Instruments", MP=INA240A1PW, Pins=8, SnapEDA_Link=https://www.snapeda.com/parts/INA240A1PW/Texas+Instruments/view-part/?ref=snap, Source=INA240A1PW.SchLib
U8: library part CMP-014-00080-5, "General Purpose Amplifier 1 Circuit Rail-to-Rail SOT-23-5", Case/Package="SOT-23 Microchip", Availability=Unavailable, Component Type=Standard, Design Item ID=MCP601T-I/OT, MF=Microchip, MP=MCP601T-I/OT, Pins=5, Price=None, SnapEDA_Link=https://www.snapeda.com/parts/MCP601T-I/OT/Microchip/view-part/43729/?ref=snap, Source=SnapEDAsch.SchLib
U9: library part CMP-098-000007-1, "Out: 5V, 1.5A; In: 7V to 35V; Pacakge: TO-263", Output Current=1.5A, Package=TO-263, Voltage Input Maximum="7V to 35V", Voltage Output=5V, Component Type=Standard, ComponentLink1Description="Datasheet link", ComponentLink1URL=https://www.st.com/resource/en/datasheet/l78.pdf, ComponentLink2Description="Supplier 1 URL", ComponentLink2URL=https://www.mouser.com/ProductDetail/STMicroelectronics/L7805ACD2T-TR?qs=Ctxo64yJVFuOLXlPPZdJUQ%3D%3D, ComponentLink3Description="Supplier 2 URL", ComponentLink3URL=https://www.digikey.com/en/products/detail/stmicroelectronics/L7805ACD2T-TR/1038230, ComponentLink4Description="Supplier 3 URL", ComponentLink4URL=https://www.thegioiic.com/l7805acd2t-ic-on-ap-5v-1-5a, Design Item ID=L7805ACD2T_TO-263, Pin Count=3, Source=78xx.SchLib, Supplier 1 Name=Mouser, Supplier 1 SN=511-L7805ACD2T-TR, Supplier 1 URL=https://www.mouser.com/ProductDetail/STMicroelectronics/L7805ACD2T-TR?qs=Ctxo64yJVFuOLXlPPZdJUQ%3D%3D, Supplier 2 Name=Digi-Key, Supplier 2 SN=497-7253-2-ND, Supplier 2 URL=https://www.digikey.com/en/products/detail/stmicroelectronics/L7805ACD2T-TR/1038230, Supplier 3 Name=thegioiic, Supplier 3 SN=N/A, Supplier 3 URL=https://www.thegioiic.com/l7805acd2t-ic-on-ap-5v-1-5a
U10 U11: library part CMP-149-000001-2, "Linear Voltage Regulator IC Positive Fixed 1 Output 500mA TSOT-23-5", Package="SOT-23-5 Richtek", Check_prices=https://www.snapeda.com/parts/RT9013-33GB/Richtek/view-part/?ref=eda, Component Type=Standard, Design Item ID=RT9013-33GB, MF="Richtek USA", MP=RT9013-33GB, Pin Count=4, SnapEDA_Link=https://www.snapeda.com/parts/RT9013-33GB/Richtek/view-part/?ref=snap, Source=RT9013-33GB.SchLib
U12_ESP_USB U12_STM_USB: library part CMP-004-00115-2, "12.5V Clamp 8A (8/20Âµs) Ipp Tvs Diode Surface Mount SC-88/SC70-6/SOT-363", Case/Package="SC-88-6 ON Semiconductor", Check_prices=https://www.snapeda.com/parts/SMF05CT1G/Onsemi/view-part/?ref=eda, Component Type=Standard, Design Item ID=SMF05CT1G, MF="ON Semiconductor", MP=SMF05CT1G, Pins=6, SnapEDA_Link=https://www.snapeda.com/parts/SMF05CT1G/Onsemi/view-part/?ref=snap, Source=SMF05CT1G.SchLib
U13: library part CMP-00001-1, "SSD1306_China , 0.96 inch display"
U14_PhaseA U14_PhaseB U14_PhaseC: library part CMP-031-00014-2, "Half-Bridge Gate Driver IC Non-Inverting 8-SOIC", Case/Package="SOIC-8 Infineon", Check_prices=https://www.snapeda.com/parts/IR2104SPBF/Infineon/view-part/?ref=eda, Component Type=Standard, Design Item ID=IR2104SPBF, MF=Infineon, MP=IR2104SPBF, Pins=8, SnapEDA_Link=https://www.snapeda.com/parts/IR2104SPBF/Infineon/view-part/?ref=snap, Source=IR2104SPBF.SchLib
U15: library part CMP-031-00018-2, Case/Package=None, Availability=Unavailable, Component Type=Standard, Design Item ID=ESP32-C3FH4, MP=ESP32-C3FH4, Pins=33, Price=None, Source=ESP32-C3FH4.SchLib
U16: library part CMP-031-00021-3, "FLASH - NOR Memory IC 128Mb (16M x 8) SPI - Quad I/O, QPI, DTR 133 MHz 8-SOIC", Case/Package="SOIC-8 Winbond Electronics", Check_prices=https://www.snapeda.com/parts/W25Q128JVSIQ/Winbond/view-part/?ref=eda, Component Type=Standard, Design Item ID=W25Q128JVSIQ, MF="Winbond Electronics", MP=W25Q128JVSIQ, Pins=8, SnapEDA_Link=https://www.snapeda.com/parts/W25Q128JVSIQ/Winbond/view-part/?ref=snap, Source=W25Q128JVSIQ.SchLib
Y1: library part CMP-003-00059-1, "CRYSTAL 8MHZ 8PF SMD", Case/Package=NX3225SA, Frequency=8MHz, Load Capacitance=8pF, Manufacturer=NDK, Manufacturer Part Number=NX3225SA-25.000M-STD-CRS-2, Temperature="-40°C to +125°C", Temperature Range High=125°C, Temperature Range Low=-40°C, Tolerance=15ppm, Automotive=Yes, Automotive Grade="Grade 1", Category=Crys, Component Type=Standard, Design Item ID=CMP-200220-000002-1, Device Class L1="Passive Components", Device Class L2="Crystals / Oscillators", Device Class L3=Crystals, Digikey Description="CRYSTAL 40MHZ 8PF SMD", Esr=100, Height=0.6mm, Lead Free=Yes, Octopart=https://octopart.com/nx3225sa-25.000m-std-crs-2-ndk-51374293, Pins=4, RoHS=TRUE, Series=NX3225SA, Source="Components - 28.03.25 - 23.15.SchLib"
Y2 Y3: library part CMP-003-00053-1, "Parallel - Fundamental Quartz Crystal, 0.032768MHz Nom", Frequency Stability=0.0144%, Frequency Tolerance=20ppm, Load Capacitance=12.5pF, Max Operating Temperature=85°C, Min Operating Temperature=-40°C
Y4: library part CMP-003-00058-1, "CRYSTAL 40MHZ 8PF SMD", Case/Package=NX3225SA, Frequency=40MHz, Load Capacitance=8pF, Manufacturer=NDK, Manufacturer Part Number=NX3225SA-25.000M-STD-CRS-2, Temperature="-40°C to +125°C", Temperature Range High=125°C, Temperature Range Low=-40°C, Tolerance=15ppm, Automotive=Yes, Automotive Grade="Grade 1", Category=Crys, Component Type=Standard, Design Item ID=CMP-200220-000002-1, Device Class L1="Passive Components", Device Class L2="Crystals / Oscillators", Device Class L3=Crystals, Digikey Description="CRYSTAL 40MHZ 8PF SMD", Esr=100, Height=0.6mm, Lead Free=Yes, Octopart=https://octopart.com/nx3225sa-25.000m-std-crs-2-ndk-51374293, Pins=4, RoHS=TRUE, Series=NX3225SA, Source="Components - 28.03.25 - 23.15.SchLib"

## Via types
v1: diameter 0.5, hole 0.3, Top Layer to Bottom Layer, tented both sides, 148 vias
v2: diameter 0.5, hole 0.3, Top Layer to Signal1, tented both sides, 58 vias
v3: diameter 0.5, hole 0.3, Top Layer to Signal2, tented both sides, 52 vias
v4: diameter 1.27, hole 0.711, Top Layer to Bottom Layer, tented both sides, 48 vias
v5: diameter 0.508, hole 0.3, Top Layer to Bottom Layer, tented both sides, 34 vias
v6: diameter 0.5, hole 0.3, Bottom Layer to Signal2, tented both sides, 19 vias
v7: diameter 0.5, hole 0.3, Bottom Layer to Signal1, tented both sides, 5 vias
v8: diameter 1.27, hole 0.711, Top Layer to Bottom Layer, 4 vias
v9: diameter 0.5, hole 0.3, Signal1 to Signal2, tented both sides, 4 vias

## Nets (pads, with @x,y where several pads share a name; then routed paths per layer and width w, separated by ;. In a path a pad name is that pad's centre, name@x,y a point inside that pad or via, vN(x,y) a via of type N, cw(c..) or ccw(c..) an arc to the next point about the centre after c; other vN are vias at no path point)
3V3_1: C1.1 C2.2 C3.2 C4.2 C5.2 C6.2 C7.2 C22.2 C27.2 C37_I_PhaseA.1 C37_I_PhaseB.1 C37_I_PhaseC.1 C38_I_PhaseA.2 C38_I_PhaseB.2 C38_I_PhaseC.2 C39_I_PhaseA.2 C39_I_PhaseB.2 C39_I_PhaseC.2 C40_I_PhaseA.2 C40_I_PhaseB.2 C40_I_PhaseC.2 C41_I_PhaseA.2 C41_I_PhaseB.2 C41_I_PhaseC.2 C76.2 C77.2 C78.2 D17.C F1.1 FB1.1 FB2.1 P1.1 P2.4 P3.4 P4.4 R5.2 R7.2 R33.2 R50.2 R51.2 R52.2 R53.2 U1.23 U1.35 U1.48 U3.5 U4.5 U5.5 U6.5 U7_I_PhaseA.5 U7_I_PhaseA.6 U7_I_PhaseB.5 U7_I_PhaseB.6 U7_I_PhaseC.5 U7_I_PhaseC.6 U8.5 U13.6 U13.9 U13.11 | length 46.4
  Top Layer w0.127: 35.29,-12.081 35.306,-12.065
  Top Layer w0.2: -8.142,-1.651 U1.35@-6.611,-3.182
  Top Layer w0.254: v2(-9.671,-1.651) -8.142,-1.651 ; -3.655,-11.458 -3.302,-11.811 -2.413,-11.811 -1.778,-11.176 -1.778,-10.287 R5.2@-2.476,-9.588 ; U1.23@-1.753,0 -1.545,0.209 -1.545,1.122 v2(-0.889,1.778)
  Top Layer w0.508: U13.6@-14.652,10.16 -14.652,7.54 -13.843,6.731 -13.843,2.164 -13.526,1.847 C77.2@-13.526,1.841 ; v2(-0.889,1.778) 0,2.667 0,6.35 1.651,8.001 6.223,8.001
  Signal1 w0.127: v2(-9.671,-1.651) -9.652,-1.632 -9.652,0.127 -8.636,1.143 -5.08,1.143 -4.064,2.159 -2.717,2.159 -2.336,1.778 v2(-0.889,1.778)
  Bottom Layer w1.016: v6(7.57,5.13) U8.5@7.57,9.337
  other v1: 8.128,-12.319 33.655,-4.445 40.386,-3.175 35.687,14.478
  other v2: -5.219,-13.196 -18.161,0.762 -14.097,1.27
  other v3: 10.795,7.112 12.827,12.319 9.779,21.336
  other v6: 7.62,5.969 7.62,6.604
3V3_2: C80.1 C81.2 C82.2 C83.2 C84.2 C85.2 C86.2 C87.2 C88.2 C91.2 C92.2 C93.2 C95.2 F2.1 L1.2 R36.2 R61.2 R62.2 R67.2 R68.2 R69.2 U15.11 U15.17 U15.31 U15.32 | length 2.7
  Top Layer w0.127: U15.17@-15.061,-15.942 -15.058,-15.942 U15.17@-14.986,-16.014 ; C95.2@-11.488,-15.557 -11.432,-15.501 -11.432,-15.131 -11.421,-15.12 -11.421,-15.004 -11.347,-14.93 -10.421,-14.93 -10.238,-15.113 v2(-10.16,-15.113)
  Top Layer w0.381: v1(-14.986,-16.637) U15.17@-14.986,-16.014
  other v1: -19.939,-17.78 -26.924,-16.129 -21.876,-2.259
5Vin: C52.2 C53.2 C68.2 D13.C Q4.3 U9.2
5Vout: C54.2 C56.2 C62.2 C70_ESP_USB.2 C70_STM_USB.2 F4.1 FB3.1 FB4.1 FB5_ESP_USB.2 FB5_STM_USB.2 | length 12.6
  Top Layer w0.381: C70_STM_USB.2@-2.843,-14.585 -2.843,-13.544 -2.78,-13.48 v1@-2.78,-13.476
  Bottom Layer w0.381: -5.207,-4.953 -5.207,-7.493 -5.715,-8.001 -5.715,-13.081 -5.334,-13.462 v1(-2.794,-13.462)
Antenna: Ant1.SIG C97.2 L2.3 | length 3.9
  Top Layer w0.363: Ant1.SIG@-31.496,-12.048 -29.298,-12.048 ccw(c-29.298,-11.908) -29.199,-12.007 -28.06,-12.007 -27.991,-11.938 L2.3@-27.686,-11.938 L2.3@-27.658,-11.91
AS5600-DIR: P1.4 U1.42 | length 53.3
  Top Layer w0.127: v3(-6.477,-7.874) -6.406,-7.803 -6.406,-7.481 U1.42@-5.197,-6.272
  Top Layer w0.508: P1.4@35.052,-19.194 35.052,-22.274 v3(35.154,-22.377)
  Signal2 w0.254: v3(-6.477,-7.874) -5.969,-8.382 4.953,-8.382 19.304,-22.733 34.798,-22.733 v3(35.154,-22.377)
AS5600-OUT: P1.5 U1.43 | length 51.7
  Top Layer w0.127: v3(-5.588,-7.366) v3@-5.586,-7.366 ; U1.43@-4.845,-6.626 U1.43@-4.843,-6.626 ; v3@36.552,-21.693 v3(36.576,-21.717)
  Top Layer w0.254: v3@-5.586,-7.366 U1.43@-4.845,-6.626
  Top Layer w0.508: v3@36.552,-21.693 P1.5@36.552,-19.194
  Signal2 w0.254: v3(-5.588,-7.366) 5.461,-7.366 19.812,-21.717 v3(36.576,-21.717)
AS5600-PGO: P1.6 U1.26 | length 57
  Top Layer w0.254: v3(-4.445,1.143) -4.398,1.096 -4.398,0.969 U1.26@-3.429,0
  Top Layer w0.508: v3@38.052,-21.669 P1.6@38.052,-19.194
  Signal2 w0.254: v3(-4.445,1.143) -3.302,2.286 3.302,2.286 23.749,-18.161 34.544,-18.161 v3(38.1,-21.717)
AS5600-SCL: P1.2 R51.1 R55.2 U1.38 U13.18 | length 97.8
  Top Layer w0.254: v3(-14.605,4.064) -14.605,3.997 -14.478,3.87 -14.478,2.159 -15.625,1.012 R51.1@-16.379,1.012 -16.387,1.004 -16.387,-1.393 -12.319,-5.461 -9.585,-5.461 -9.337,-5.213 -7.836,-5.213 -7.707,-5.341 -7.095,-5.341 U1.38@-6.611,-4.858 ; v3(-6.223,8.636) -6.195,8.664 -6.195,10.132 U13.18@-6.168,10.16 -6.168,12.755 -3.179,15.744 R55.2@6.092,15.744
  Top Layer w0.508: P1.2@32.052,-19.194 32.052,-21.003 v3(32.131,-21.082)
  Signal2 w0.254: v3(-14.605,4.064) -12.159,4.064 -11.905,3.81 -9.525,3.81 -6.223,7.112 v3(-6.223,8.636) ; v3(-9.652,-5.461) -8.89,-6.223 6.223,-6.223 19.558,-19.558 30.607,-19.558 v3(32.131,-21.082)
AS5600-SDA: P1.3 R52.1 R56.2 U1.47 U13.19 U13.20 | length 120.3
  Top Layer w0.127: P1.3@33.528,-19.218 P1.3@33.552,-19.194
  Top Layer w0.254: U13.19@-5.461,10.16 -5.461,11.938 -2.663,14.736 R52.1@6.092,14.736 R56.2@6.092,13.712 ; v3(-3.429,-9.398) -3.937,-8.89 -3.937,-8.548 U1.47@-3.429,-8.04
  Top Layer w0.508: v3(33.528,-23.622) P1.3@33.528,-19.218
  Signal1 w0.254: v9(-18.288,-5.715) -16.002,-5.715 v9(-14.351,-7.366)
  Signal2 w0.254: v9(-18.288,-5.715) -20.701,-3.302 -20.701,1.524 -19.685,2.54 -6.985,2.54 4.572,14.097 v3(4.572,14.732) ; v9(-14.351,-7.366) -12.319,-9.398 v3(-3.429,-9.398) 3.048,-9.398 17.272,-23.622 v3(33.528,-23.622)
B2: R1.2 U1.19 | length 13.2
  Top Layer w0.127: v3(8.86,-4.521) 8.953,-4.521 9.509,-5.076 R1.2@9.521,-5.076
  Top Layer w0.254: U1.19@-0.339,-1.414 1.79,0.715 1.985,0.715 v3(2.032,0.762)
  Signal2 w0.254: v3(2.032,0.762) 3.556,0.762 8.839,-4.521 v3(8.86,-4.521)
BAT_Volt: C47.2 R30.2 U1.18 U8.1 U8.4 | length 13.9
  Top Layer w0.127: v2@1.651,-0.066 v2(1.713,-0.066)
  Top Layer w0.254: U1.18@0.015,-1.768 v2@1.713,-0.07
  Signal1 w0.508: v2(1.713,-0.066) 1.268,-0.066 1.082,0.12 1.082,2.479 1.778,3.175 v9(2.667,3.175)
  Signal2 w0.508: v9(2.667,3.175) 2.667,7.493 4.027,8.853 4.027,9.041 v6(4.098,9.113)
BatVoltage: C51.1 D18_PhaseA.A D18_PhaseB.A D18_PhaseC.A F3.2 Q7_PhaseA.4 Q7_PhaseB.4 Q7_PhaseC.4 R28.2 U9.1 U14_PhaseA.1 U14_PhaseB.1 U14_PhaseC.1 | length 2.9
  Top Layer w0.762: v1(14.097,7.652) v1(14.986,7.652) ; v1@14.938,7.699 16.843,7.699 16.891,7.747
  other v1: 16.781,-5.715 13.335,-5.461 14.097,-5.461 14.859,-5.461 14.732,22.225 15.367,22.225 16.002,22.225 16.764,22.225 17.399,22.225 19.304,22.225
C1N: C72.1 U13.5 | length 7.5
  Top Layer w0.254: U13.5@-15.359,10.16 -15.359,2.728 C72.1@-15.298,2.667
C1P: C72.2 U13.4 | length 7.5
  Top Layer w0.254: C72.2@-16.198,2.667 -16.066,2.799 U13.4@-16.066,10.16
C2N: C71.1 U13.3 | length 6.6
  Top Layer w0.254: C71.1@-17.711,3.937 -16.773,4.875 U13.3@-16.773,10.16
C2P: C71.2 U13.2 | length 6.7
  Top Layer w0.254: C71.2@-18.611,3.937 -18.611,6.789 -17.48,7.92 U13.2@-17.48,10.16
CHIP_EN: R69.1 R73.2 U15.7 U17.2 | length 11.1
  Top Layer w0.254: R73.2@-21.979,-22.217 -21.975,-22.217 R69.1@-21.975,-21.213 ; U17.2@-20.193,-20.017 -20.339,-20.017 -21.535,-21.213 R69.1@-21.975,-21.213 ; U15.7@-19.951,-15.442 -19.959,-15.45 -20.403,-15.45 -22.733,-17.78 -22.733,-20.955 -22.475,-21.213 R69.1@-21.975,-21.213
D/C: R50.1 R54.2 U13.15 | length 19.7
  Top Layer w0.254: U13.15@-8.289,10.16 -8.289,12.158 -2.536,17.911 R50.1@5.965,17.911 R54.2@5.965,16.895
D_ESP_USB_N: J3_ESP_USB.A7 J3_ESP_USB.B7 R44_ESP_USB.1 U12_ESP_USB.4 | length 5.9
  Top Layer w0.2: U12_ESP_USB.4@-8.524,-16.175 -8.517,-16.183 -8.517,-17.645 R44_ESP_USB.1@-8.509,-17.653 ; R44_ESP_USB.1@-8.509,-17.665 -8.357,-17.817 J3_ESP_USB.B7@-8.357,-19.05 -8.382,-19.075 -8.382,-19.97 -8.286,-20.066 -7.453,-20.066 -7.357,-19.97 J3_ESP_USB.A7@-7.357,-19.05
D_ESP_USB_P: J3_ESP_USB.A6 J3_ESP_USB.B6 R45_ESP_USB.1 U12_ESP_USB.6 | length 4.8
  Top Layer w0.2: J3_ESP_USB.A6@-7.857,-19.05 -7.857,-18.226 -7.761,-18.13 -6.906,-18.13 ; U12_ESP_USB.6@-7.224,-16.175 -7.224,-16.51 -6.989,-16.745 R45_ESP_USB.1@-6.989,-17.653 -6.906,-17.736 -6.906,-18.13 ; J3_ESP_USB.B6@-6.857,-19.05 -6.857,-18.624 -6.906,-18.575 -6.906,-18.13
D_STM_USB_N: J3_STM_USB.A7 J3_STM_USB.B7 R44_STM_USB.1 U12_STM_USB.4 | length 4.8
  Top Layer w0.2: J3_STM_USB.B7@1.921,-19.05 1.921,-18.241 2.017,-18.145 2.872,-18.145 ; U12_STM_USB.4@2.525,-16.175 2.525,-17.24 2.798,-17.514 R44_STM_USB.1@2.798,-17.526 2.872,-17.6 2.872,-18.145 ; J3_STM_USB.A7@2.921,-19.05 2.921,-18.624 2.872,-18.575 2.872,-18.145
D_STM_USB_P: J3_STM_USB.A6 J3_STM_USB.B6 R45_STM_USB.1 U12_STM_USB.6 | length 5.7
  Top Layer w0.2: J3_STM_USB.A6@2.421,-19.05 2.421,-19.851 2.517,-19.947 3.325,-19.947 3.421,-19.851 3.421,-17.923 3.806,-17.538 R45_STM_USB.1@3.806,-17.526 3.814,-17.518 3.814,-16.187 U12_STM_USB.6@3.825,-16.175
DIR_IN: P2.1 U1.22 | length 34.9
  Top Layer w0.254: P2.1@-31.513,1.234 -31.495,1.252 -19.195,1.252 v3(-19.177,1.27) ; U1.22@-1.4,-0.354 -0.174,0.872 -0.174,1.346 v3(-0.127,1.393)
  Signal2 w0.254: v3(-19.177,1.27) -5.715,1.27 -4.699,0.254 -0.762,0.254 -0.127,0.889 v3(-0.127,1.393)
DR_ESP_USB_N: R42_ESP_USB.1 R44_ESP_USB.2 R46_ESP_USB.2 U15.25 | length 16.1
  Top Layer w0.2: U15.25@-15.756,-11.747 -14.047,-11.747 -13.947,-11.747 ccw(c-13.947,-11.393) -13.593,-11.393 -13.593,-11.349 cw(c-13.239,-11.349) -12.885,-11.349 -12.885,-12.664 ccw(c-12.531,-12.664) -12.177,-12.664 -12.177,-11.349 cw(c-11.823,-11.349) -11.469,-11.349 -11.469,-11.393 ccw(c-11.115,-11.393) -11.115,-11.747 -10.506,-11.747 -10.224,-11.747 -9.521,-12.45 R46_ESP_USB.2@-9.521,-15.871 R42_ESP_USB.1@-9.521,-16.768 -9.527,-16.774 -9.527,-17.647 R44_ESP_USB.2@-9.533,-17.653
DR_ESP_USB_P: R43_ESP_USB.1 R45_ESP_USB.2 R47_ESP_USB.2 U15.26 | length 16.3
  Top Layer w0.2: U15.26@-16.256,-11.747 -16.256,-11.176 -15.494,-10.414 -9.612,-10.414 -5.973,-14.053 R43_ESP_USB.1@-5.973,-15.744 R47_ESP_USB.2@-5.973,-16.895 -5.969,-16.899 -5.969,-17.649 R45_ESP_USB.2@-5.965,-17.653
DR_STM_USB_N: R42_STM_USB.1 R44_STM_USB.2 R46_STM_USB.2 U1.33 | length 25.9
  Top Layer w0.2: v2(-8.001,-0.508) -7.92,-0.508 -5.953,-2.475 U1.33@-5.904,-2.475 ; v2(1.399,-14.734) 1.399,-15.75 R42_STM_USB.1@1.401,-15.752 1.401,-17.28 1.497,-17.376 1.636,-17.376 1.774,-17.514 R44_STM_USB.2@1.774,-17.526
  Signal1 w0.2: v2(-8.001,-0.508) -8.048,-0.555 -8.048,-0.809 -8.89,-1.651 -8.89,-6.35 -0.506,-14.734 v2(1.399,-14.734)
DR_STM_USB_P: R43_STM_USB.1 R45_STM_USB.2 R47_STM_USB.2 U1.34 | length 25.4
  Top Layer w0.2: v2(-7.493,-1.651) -7.464,-1.651 -6.286,-2.828 U1.34@-6.257,-2.828 ; R45_STM_USB.2@4.83,-17.526 4.83,-17.514 4.968,-17.376 4.974,-17.376 5.07,-17.28 R43_STM_USB.1@5.07,-16.639 ; R43_STM_USB.1@5.076,-16.633 R47_STM_USB.2@5.076,-15.752 v2(5.076,-14.736)
  Signal1 w0.2: v2(-7.493,-1.651) -6.477,-2.667 -6.477,-5.207 -6.096,-5.588 -6.025,-5.659 ccw(c-5.775,-5.408) -5.525,-5.659 -5.347,-5.482 cw(c-5.097,-5.732) -4.847,-5.482 cw(c-5.097,-5.732) -4.847,-5.982 -5.024,-6.159 ccw(c-4.774,-6.41) -5.024,-6.66 -4.22,-7.464 -4.15,-7.534 -4.064,-7.62 -2.04,-7.62 v2(5.076,-14.736)
ESP-ST_SPI-CLK: U1.13 U15.12 | length 38.5
  Top Layer w0.254: v3(-18.923,-18.161) -18.415,-18.161 -17.756,-17.502 U15.12@-17.756,-16.637 ; U1.13@1.782,-3.536 1.991,-3.327 2.565,-3.327 v3(2.667,-3.429)
  Signal2 w0.191: v3(-18.923,-18.161) -18.923,-19.05 -18.542,-19.431 -17.907,-19.431 -17.526,-19.05 -17.526,-8.89 -12.827,-4.191 1.524,-4.191 2.286,-3.429 v3(2.667,-3.429)
ESP-ST_SPI-CS: U1.12 U15.16 | length 55.5
  Top Layer w0.127: U15.16@-15.756,-16.637 -15.756,-16.907 -15.684,-16.979 -15.651,-16.979 -15.241,-17.388 -15.241,-17.789 v3(-15.201,-17.829)
  Top Layer w0.254: U1.12@1.782,-4.504 1.991,-4.713 2.092,-4.713 v3(2.487,-4.318)
  Signal2 w0.191: v3(-15.201,-17.829) -15.201,-19.009 -15.113,-19.097 -15.113,-20.193 -15.975,-21.055 -19.077,-21.055 -22.479,-17.653 -22.479,-15.24 -19.431,-12.192 -19.431,-7.874 -14.605,-3.048 -1.778,-3.048 0.254,-1.016 3.302,-1.016 4.191,-1.905 4.191,-3.683 3.556,-4.318 v3(2.487,-4.318)
ESP-ST_SPI-MISO: R61.1 U1.14 U15.6 | length 37.5
  Top Layer w0.254: v1(-21.463,-15.621) -20.784,-14.942 U15.6@-19.951,-14.942 ; U1.14@1.429,-3.182 2.151,-2.46 2.366,-2.46 v3(2.413,-2.413)
  Signal2 w0.191: v1(-21.463,-15.621) -18.796,-12.954 -18.796,-8.255 -13.97,-3.429 0.127,-3.429 1.143,-2.413 v3(2.413,-2.413)
  Bottom Layer w0.508: R61.1@-22.102,-17.649 -22.102,-16.26 v1(-21.463,-15.621)
ESP-ST_SPI-MOSI: U1.15 U15.13 | length 39.7
  Top Layer w0.127: U1.15@1.075,-2.828 U1.15@1.092,-2.828
  Top Layer w0.254: v3(-18.161,-18.669) -18.104,-18.612 -17.85,-18.612 -17.256,-18.018 U15.13@-17.256,-16.637 ; U1.15@1.092,-2.828 2.269,-1.651 v3(2.794,-1.651)
  Signal2 w0.191: v3(-18.161,-18.669) -18.161,-8.636 -13.335,-3.81 0.762,-3.81 1.651,-2.921 2.847,-2.921 3.175,-2.593 3.175,-2.032 v3(2.794,-1.651)
ESP_UART0_RX: R2.1 U15.27 | length 11.4
  Top Layer w0.191: U15.27@-16.756,-11.747 -16.756,-10.914 -15.748,-9.906 -10.033,-9.906 R2.1@-7.601,-7.474
ESP_UART0_TX: R3.1 U15.28 | length 11.8
  Top Layer w0.191: U15.28@-17.256,-11.747 -17.256,-10.525 -16.129,-9.398 -10.795,-9.398 R3.1@-8.236,-6.839